# Altium PCB SMT-PBTS(Altium)v1.0.pcbdoc
Units mil, origin at the board's own origin, x right, y up, seen from the top; angles counter-clockwise.
Board outline 4553.31 x 3374.51 mil, 2 copper layers (Top Layer, Bottom Layer); 93 components, 72 nets, 271 pads, 191 vias.
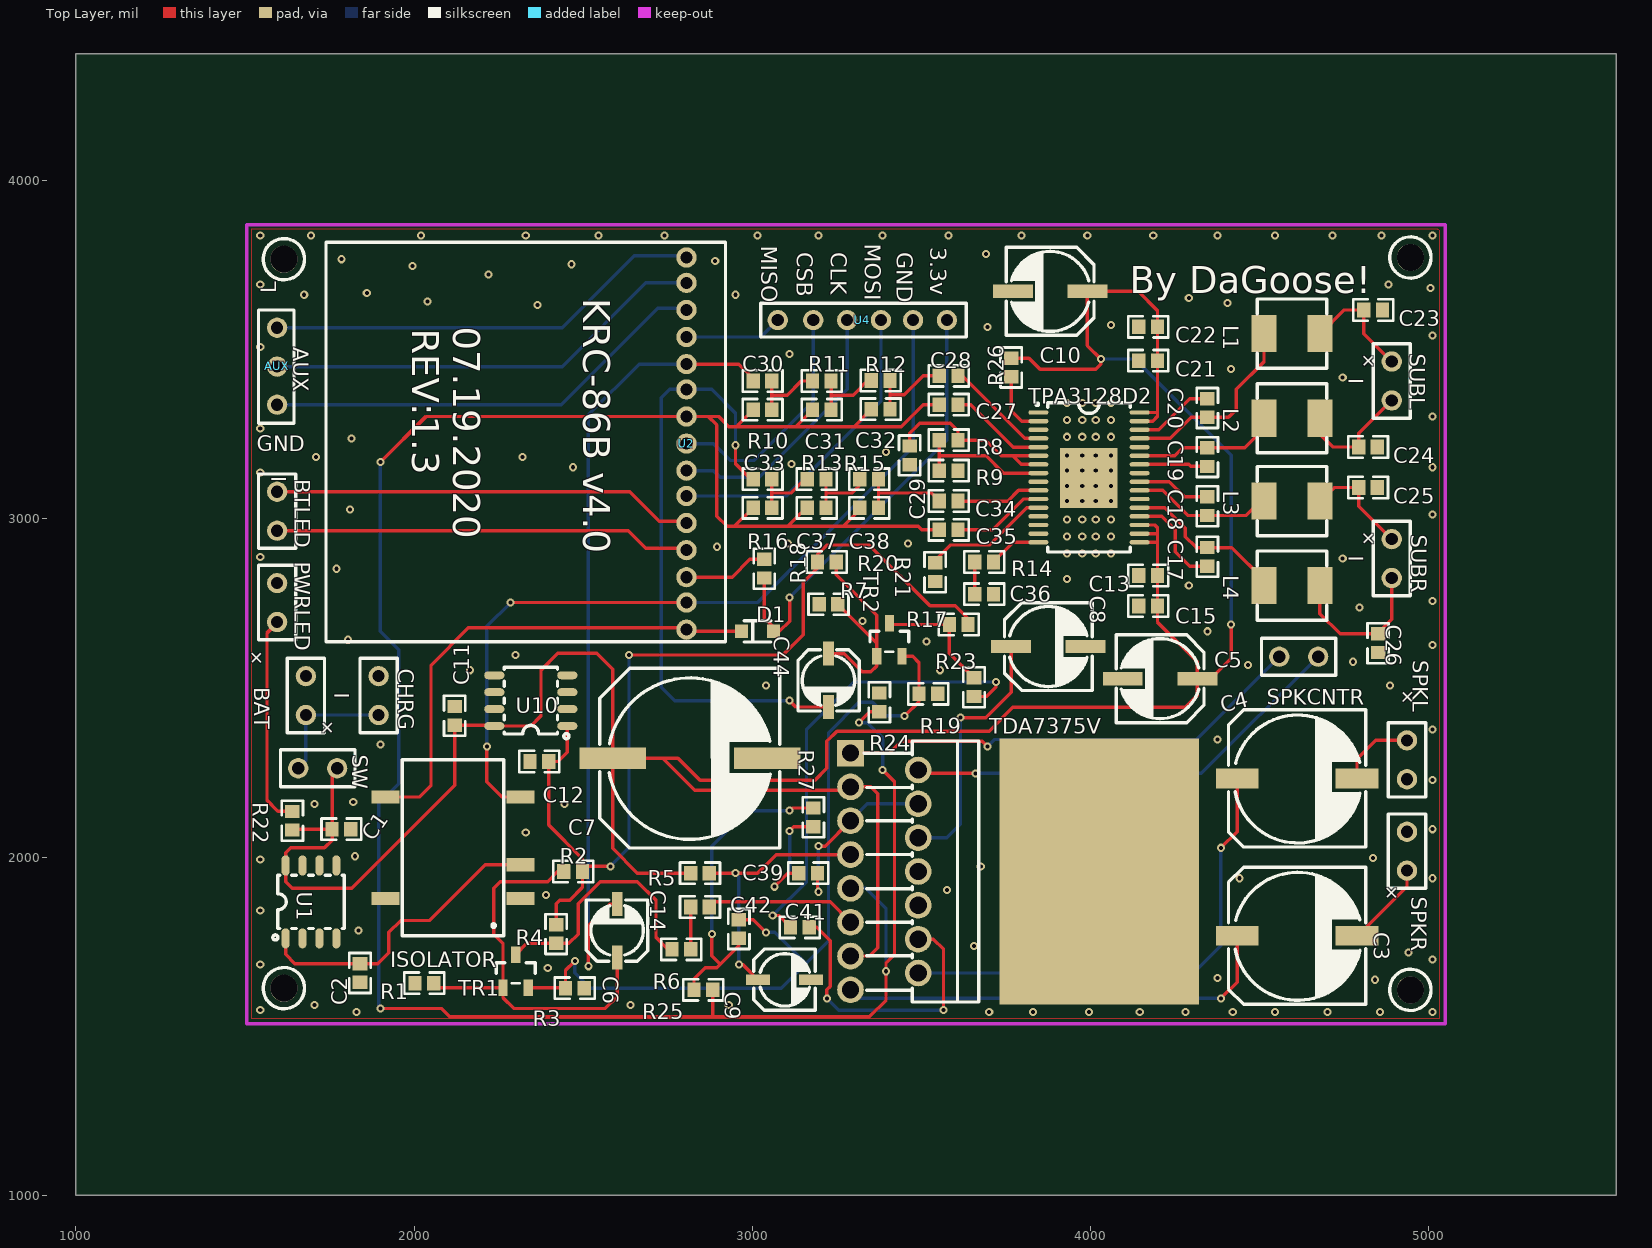
[diagram p0: Top Layer view]
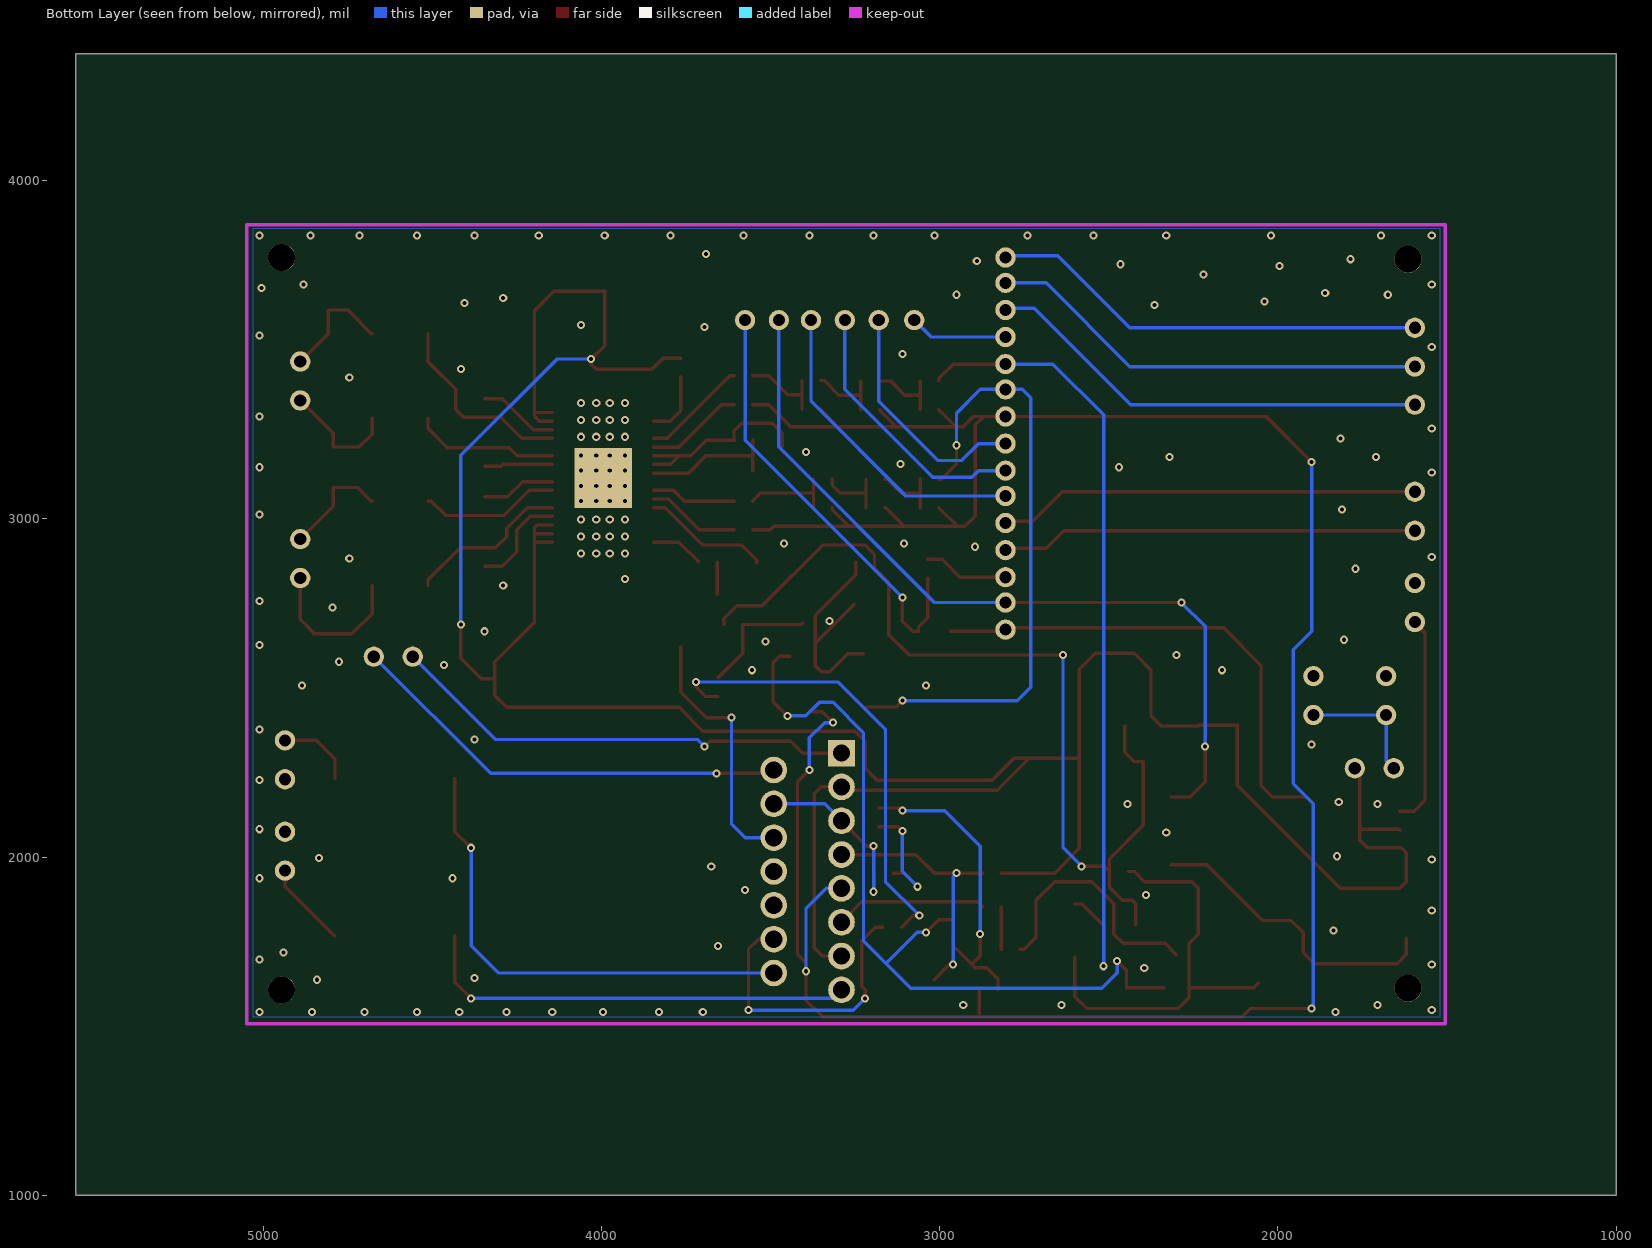
[diagram p1: Bottom Layer view, seen from below]

## Layer stack, top to bottom
Top Layer: signal copper (thickness not stored)
Dielectric: dielectric 12.6, FR-4, Dk 4.8
Bottom Layer: signal copper (thickness not stored)

## Board outline
5553.31,1000 1000,1000 1000,4374.51 5553.31,4374.51

## Components (designator, comment, footprint, x,y, rotation, side; value= is the part's Value field where it differs from the comment)
AUX "CONNECTOR (3)" "CONNECTOR (3)" 1595,3507.5 r270 top
BAT "CONNECTOR (2)" "CONNECTOR (2)" 1680,2477.5 r90 top
BTLED "CONNECTOR (2)" "CONNECTOR (2)" 1595,3022.5 r270 top
C1 "0603" 0603 1785,2082.5 r180 top
C2 "0603" 0603 1840,1657.5 r270 top
C3 "CAP-SMD_BD10.0-L10.3-W10.3-FD" CAP-SMD_BD10.0-L10.3-W10.3-FD 4610,1767.5 r0 top
C4 "CAP-SMD_BD10.0-L10.3-W10.3-FD" CAP-SMD_BD10.0-L10.3-W10.3-FD 4610,2232.5 r0 top
C5 "CAP-SMD_BD6.3-L6.6-W6.6-FD" CAP-SMD_BD6.3-L6.6-W6.6-FD 4205,2527.5 r180 top
C6 "CAP-SMD_BD4.0-L4.3-W4.3-FD" CAP-SMD_BD4.0-L4.3-W4.3-FD 2600,1782.5 r90 top
C7 "CAP-SMD_BD12.5-L13.0-W13.0-FD" CAP-SMD_BD12.5-L13.0-W13.0-FD 2815,2292.5 r0 top
C8 "CAP-SMD_BD6.3-L6.6-W6.6-FD" CAP-SMD_BD6.3-L6.6-W6.6-FD 3875,2622.5 r0 top
C9 "CAP-SMD_BD4.0-L4.3-W4.3-FD" CAP-SMD_BD4.0-L4.3-W4.3-FD 3095,1637.5 r0 top
C10 "CAP-SMD_BD6.3-L6.6-W6.6-FD" CAP-SMD_BD6.3-L6.6-W6.6-FD 3880,3672.5 r180 top
C11 "0603" 0603 2120,2417.5 r90 top
C12 "0603" 0603 2370,2282.5 r0 top
C13 "0603" 0603 4170,2832.5 r0 top
C14 "0603" 0603 2845,1852.5 r0 top
C15 "0603" 0603 4170,2742.5 r180 top
C17 "0603" 0603 4345,2887.5 r90 top
C18 "0603" 0603 4345,3037.5 r90 top
C19 "0603" 0603 4345,3182.5 r90 top
C20 "0603" 0603 4345,3327.5 r90 top
C21 "0603" 0603 4170,3467.5 r180 top
C22 "0603" 0603 4170,3567.5 r0 top
C23 "0603" 0603 4835,3617.5 r0 top
C24 "0603" 0603 4820,3212.5 r180 top
C25 "0603" 0603 4820,3092.5 r0 top
C26 "0603" 0603 4850,2632.5 r90 top
C27 "0603" 0603 3580,3337.5 r0 top
C28 "0603" 0603 3580,3422.5 r0 top
C29 "0603" 0603 3465,3187.5 r90 top
C30 "0603" 0603 3030,3407.5 r0 top
C31 "0603" 0603 3205,3322.5 r0 top
C32 "0603" 0603 3379.26,3324 r0 top
C33 "0603" 0603 3030,3117.5 r0 top
C34 "0603" 0603 3580,3052.5 r0 top
C35 "0603" 0603 3580,2967.5 r0 top
C36 "0603" 0603 3685,2777.5 r0 top
C37 "0603" 0603 3190,3032.5 r0 top
C38 "0603" 0603 3345,3032.5 r0 top
C39 "0603" 0603 3165,1952.5 r180 top
C41 "0603" 0603 3140,1792.5 r0 top
C42 "0603" 0603 2960,1787.5 r90 top
C44 "CAP-SMD_BD4.0-L4.3-W4.3-FD" CAP-SMD_BD4.0-L4.3-W4.3-FD 3225,2522.5 r270 top
CHRG "CONNECTOR (2)" "CONNECTOR (2)" 1895,2477.5 r270 top
D1 "SOD-323_L1.8-W1.3-LS2.5-RD" SOD-323_L1.8-W1.3-LS2.5-RD 3015,2667.5 r0 top
ISOLATOR "PWRM-TH_B0505XT-1WR3" PWRM-TH_B0505XT-1WR3 2115,2027.5 r90 top
L1 "IND-SMD_L5.2-W5.2_MS0530-XX" IND-SMD_L5.2-W5.2_MS0530-XX 4595,3547.5 r0 top
L2 "IND-SMD_L5.2-W5.2_MS0530-XX" IND-SMD_L5.2-W5.2_MS0530-XX 4595,3297.5 r0 top
L3 "IND-SMD_L5.2-W5.2_MS0530-XX" IND-SMD_L5.2-W5.2_MS0530-XX 4595,3052.5 r0 top
L4 "IND-SMD_L5.2-W5.2_MS0530-XX" IND-SMD_L5.2-W5.2_MS0530-XX 4595,2802.5 r0 top
PWRLED "CONNECTOR (2)" "CONNECTOR (2)" 1595,2752.5 r270 top
R1 "0603" 0603 2030,1627.5 r0 top
R2 "0603" 0603 2470,1957.5 r0 top
R3 "0603" 0603 2475,1612.5 r0 top
R4 "0603" 0603 2420,1772.5 r90 top
R5 "0603" 0603 2845,1952.5 r0 top
R6 "0603" 0603 2790,1727.5 r0 top
R7 "0603" 0603 3225,2747.5 r0 top
R8 "0603" 0603 3580,3232.5 r0 top
R9 "0603" 0603 3580,3142.5 r0 top
R10 "0603" 0603 3030,3322.5 r0 top
R11 "0603" 0603 3205,3407.5 r0 top
R12 "0603" 0603 3379.26,3409 r0 top
R13 "0603" 0603 3190,3117.5 r0 top
R14 "0603" 0603 3685,2872.5 r0 top
R15 "0603" 0603 3345,3117.5 r0 top
R16 "0603" 0603 3030,3032.5 r0 top
R17 "0603" 0603 3610,2687.5 r0 top
R18 "0603" 0603 3035,2852.5 r90 top
R19 "0603" 0603 3520,2482.5 r0 top
R20 "0603" 0603 3220,2872.5 r180 top
R21 "0603" 0603 3540,2842.5 r90 top
R22 "0603" 0603 1640,2107.5 r90 top
R23 "0603" 0603 3655,2502.5 r90 top
R24 "0603" 0603 3375,2457.5 r90 top
R25 "0603" 0603 2855,1607.5 r180 top
R26 "0603" 0603 3765,3447.5 r90 top
R27 "0603" 0603 3180,2117.5 r90 top
SPKCNTR "CONNECTOR (2)" "CONNECTOR (2)" 4615,2592.5 r0 top
SPKL "CONNECTOR (2)" "CONNECTOR (2)" 4935,2287.5 r90 top
SPKR "CONNECTOR (2)" "CONNECTOR (2)" 4935,2017.5 r90 top
SUBL "CONNECTOR (2)" "CONNECTOR (2)" 4890,3407.5 r270 top
SUBR "CONNECTOR (2)" "CONNECTOR (2)" 4890,2882.5 r270 top
SW "CONNECTOR (2)" "CONNECTOR (2)" 1715,2262.5 r0 top
TDA7375V "MULTIWATT-15_L19.6-W5.0-P1.27-L" MULTIWATT-15_L19.6-W5.0-P1.27-L 3390,1957.5 r270 top
TPA3128D2 "HTSSOP-32_L11.0-W6.1-P0.65-LS8.1-BL-EP" HTSSOP-32_L11.0-W6.1-P0.65-LS8.1-BL-EP 3995,3122.5 r270 top
TR1 "SOT-23-3_L2.9-W1.3-P1.90-LS2.4-TR" SOT-23-3_L2.9-W1.3-P1.90-LS2.4-TR 2300,1662.5 r270 top
TR2 "SOT-23-3_L2.9-W1.3-P1.90-LS2.4-TR" SOT-23-3_L2.9-W1.3-P1.90-LS2.4-TR 3405,2642.5 r270 top
U1 "SOIC-8_L4.9-W3.9-P1.27-LS6.0-BL" SOIC-8_L4.9-W3.9-P1.27-LS6.0-BL 1695,1867.5 r0 top
U2 "KRC-86B V4.0" "KRC-86B V4.0" 2845,3342.5 r270 top
U4 "KRC-86B SPI" "KRC-86B SPI" 3230,3537.5 r180 top
U10 "SOIC-8_L4.9-W3.9-P1.27-LS6.0-BL" SOIC-8_L4.9-W3.9-P1.27-LS6.0-BL 2345,2462.5 r90 top

## Footprints (in the part's own frame and the unit in brackets; to place one, negate y for a bottom-side part, rotate by r counter-clockwise, add the part's x,y. Pads: shape width x height; smd on the part's side, far side on the other; paste and mask are expansions set on the pad)
0603 [mm]
  rect 1x1.1 smd: 1(-0.7,0) 2(0.7,0)
  silkscreen extent -1.5,-0.8 1.5,0.8
CAP-SMD_BD4.0-L4.3-W4.3-FD [mil]
  rect 70.86x31.5 smd: 1(-78.74,0) 2(78.74,0)
  silkscreen extent -91,-90 91,91
CAP-SMD_BD6.3-L6.6-W6.6-FD [mm]
  rect 3x1 smd: 1(-2.8,0) 2(2.8,0)
  silkscreen extent -3.3,-3.3 3.3,3.3
CAP-SMD_BD10.0-L10.3-W10.3-FD [mm]
  rect 3.2x1.5 smd: 1(-4.5,0) 2(4.5,0)
  silkscreen extent -5.15,-5.15 5.15,5.15
CAP-SMD_BD12.5-L13.0-W13.0-FD [mm]
  rect 5x1.6 smd: 1(-5.8,0) 2(5.8,0)
  silkscreen extent -6.75,-6.75 6.75,6.75
"CONNECTOR (2)" [mil]
  round 60 hole 36: 1(-57.5,0) 2(57.5,0)
  silkscreen extent -110,-55 110,55
"CONNECTOR (3)" [mil]
  round 60 hole 36: 1(-57.5,0) 2(57.5,0) 3(170,0)
  silkscreen extent -110,-55 225,50
HTSSOP-32_L11.0-W6.1-P0.65-LS8.1-BL-EP [mm]
  oval 0.33x1.497 smd: 1(-4.874,-3.8) 2(-4.224,-3.8) 3(-3.574,-3.8) 4(-2.926,-3.8) 5(-2.276,-3.8) 6(-1.626,-3.8) 7(-0.975,-3.8) 8(-0.325,-3.8) 9(0.325,-3.8) 10(0.975,-3.8) 11(1.626,-3.8) 12(2.276,-3.8) 13(2.926,-3.8) 14(3.574,-3.8) 15(4.224,-3.8) 16(4.874,-3.8) 17(4.874,3.8) 18(4.224,3.8) 19(3.574,3.8) 20(2.926,3.8) 21(2.276,3.8) 22(1.626,3.8) 23(0.975,3.8) 24(0.325,3.8) 25(-0.325,3.8) 26(-0.975,3.8) 27(-1.626,3.8) 28(-2.276,3.8) 29(-2.926,3.8) 30(-3.574,3.8) 31(-4.224,3.8) 32(-4.874,3.8)
  rect 4.5x4.3 smd: 33(0.051,-0.025)
  silkscreen extent -5.61,-3.98 5.6,3.1
IND-SMD_L5.2-W5.2_MS0530-XX [mm]
  rect 1.9x2.79 smd: 1(-2.1,0) 2(2.1,0)
  silkscreen extent -2.6,-2.6 2.6,2.6
"KRC-86B SPI" [mil]
  round 60 hole 36: 1(-345,-50) 2(-245,-50) 4(-150,-50) 5(-50,-50) 6(50,-50) 7(155,-50)
  silkscreen extent -402,-100 205,0
"KRC-86B V4.0" [mil]
  round 60 hole 36: 1(-430,-40) 2(-355,-40) 3(-275,-40) 4(-195,-40) 5(-115,-40) 6(-40,-40) 7(40,-40) 8(120,-40) 9(200,-40) 10(275,-40) 11(355,-40) 12(435,-40) 13(515,-40) 14(590,-40) 15(670,-40)
  silkscreen extent -476,-1106 706,76
MULTIWATT-15_L19.6-W5.0-P1.27-L [mm]
  rect 2x2 hole 1.3: 1(-8.89,-2.54)
  round 2 hole 1.3: 2(-7.62,2.54) 3(-6.35,-2.54) 4(-5.08,2.54) 5(-3.81,-2.54) 6(-2.54,2.54) 7(-1.27,-2.54) 8(0,2.54) 9(1.27,-2.54) 10(2.54,2.54) 11(3.81,-2.54) 12(5.08,2.54) 13(6.35,-2.54) 14(7.62,2.54) 15(8.89,-2.54)
  silkscreen extent -9.8,-1.52 9.8,7.09
PWRM-TH_B0505XT-1WR3 [mm]
  rect 1x2.1 smd: 1(-3.81,-5.08) 2(-1.27,-5.08) 4(3.81,-5.08) 5(3.81,5.08) 8(-3.81,5.08)
  silkscreen extent -6.6,-3.81 6.6,3.81
SOD-323_L1.8-W1.3-LS2.5-RD [mm]
  rect 1x1 smd: 1(-1.2,0) 2(1.2,0)
  silkscreen extent -1,-0.8 1,0.8
SOIC-8_L4.9-W3.9-P1.27-LS6.0-BL [mm]
  oval 0.6x1.518 smd: 1(-1.905,-2.74) 2(-0.635,-2.74) 3(0.635,-2.74) 4(1.905,-2.74) 5(1.905,2.74) 6(0.635,2.74) 7(-0.635,2.74) 8(-1.905,2.74)
  silkscreen extent -2.86,-2.86 2.5,2
SOT-23-3_L2.9-W1.3-P1.90-LS2.4-TR [mm]
  rect 1.25x0.7 smd: 1(1.25,0.95) 2(1.25,-0.95) 3(-1.25,0)
  silkscreen extent -0.65,-1.46 0.9,1.46

## Free pads (board coordinates)
  rect 590.55x787.4 smd: 1(4025,1957.5)
  rect 169.29x177.17 smd far side: 33(3994.01,3120.5)
  round 80 hole 80 unplated: ""(1615,1612.5) ""(1615,3767.5) ""(4945,1607.5) ""(4945,3772.5)

## Via types
v1: diameter 24, hole 12, Top Layer to Bottom Layer, 191 vias

## Nets (pads, with @x,y where several pads share a name; then routed paths per layer and width w, separated by ;. In a path a pad name is that pad's centre, name@x,y a point inside that pad or via, vN(x,y) a via of type N, cw(c..) or ccw(c..) an arc to the next point about the centre after c; other vN are vias at no path point)
GND: BAT.2 C1.1 C2.2 C5.2 C7.2 C8.2 C9.2 C10.2 C11.2 C12.1 C13.1 C15.2 C21.2 C22.1 C23.2 C24.1 C25.2 C26.1 C29.1 C36.2 CHRG.1 ISOLATOR.1 pad.1 pad.33 PWRLED.1 R1.1 R3.2 R7.1 R9.2 R19.2 R21.1 R24.2 SPKL.1 SPKR.2 TDA7375V.8 TPA3128D2.1 TPA3128D2.9 TPA3128D2.13 TPA3128D2.14 TPA3128D2.15 TPA3128D2.22 TPA3128D2.25 TPA3128D2.28 TPA3128D2.33 U1.2 U1.3 U1.6 U1.7 U10.2 U10.3 U10.6 U10.7
  other v1: 1830,1542.5 3700,1542.5 3830,1542.5 3995,1542.5 4145,1542.5 4280,1542.5 4420,1542.5 4545,1542.5 4700,1542.5 4855,1542.5 5010,1542.5 1545,1547.5 1705,1562.5 2640,1562.5 2930,1562.5 4840,1637.5 4375,1642.5 2395,1672.5 1545,1682.5 5010,1697.5 4940,1717.5 3655,1737.5 1835,1782.5 1545,1842.5 2390,1887.5 3575,1902.5 4440,1937.5 5010,1937.5 3675,1972.5 1545,1992.5 4835,1997.5 1825,2002.5 2330,2072.5 5010,2082.5 1705,2157.5 2445,2157.5 1820,2162.5 5010,2227.5 1900,2332.5 4375,2347.5 5010,2377.5 3040,2507.5 4885,2507.5 2165,2552.5 3555,2552.5 4465,2567.5 4775,2577.5 2300,2597.5 5010,2627.5 3515,2637.5 1805,2642.5 4345,2667.5 3325,2697.5 4795,2737.5 5010,2757.5 4290,2802.5 3930,2822.5 1770,2852.5 4745,2882.5 1545,2887.5 3930,2897.5 3975,2897.5 4015,2897.5 4060,2897.5 2895,2917.5 3105,2927.5 3460,2927.5 3930,2947.5 3975,2947.5 4015,2947.5 4060,2947.5 3930,2997.5 3975,2997.5 4015,2997.5 4060,2997.5 5010,3012.5 1810,3027.5 3930,3052.5 3975,3052.5 4015,3052.5 4060,3052.5 3930,3097.5 3975,3097.5 4015,3097.5 4060,3097.5 1545,3137.5 3930,3142.5 3975,3142.5 4015,3142.5 4060,3142.5 2470,3152.5 5010,3152.5 3115,3162.5 1710,3182.5 2320,3182.5 3930,3187.5 3975,3187.5 4015,3187.5 4060,3187.5 3395,3197.5 1815,3237.5 3930,3242.5 3975,3242.5 4015,3242.5 4060,3242.5 1545,3267.5 3930,3292.5 3975,3292.5 4015,3292.5 4060,3292.5 5010,3302.5 3930,3342.5 3975,3342.5 4015,3342.5 4060,3342.5 4745,3417.5 4415,3442.5 3110,3487.5 1545,3507.5 5010,3542.5 3695,3567.5 4060,3572.5 2365,3632.5 4405,3637.5 2040,3642.5 4290,3652.5 1675,3662.5 2950,3662.5 1860,3667.5 5005,3682.5 1545,3692.5 4880,3692.5 2220,3722.5 1995,3747.5 2465,3752.5 2890,3762.5 1785,3767.5 3690,3782.5 1545,3837.5 1695,3837.5 2020,3837.5 2330,3837.5 2545,3837.5 2740,3837.5 3015,3837.5 3195,3837.5 3385,3837.5 3580,3837.5 3795,3837.5 3990,3837.5 4185,3837.5 4375,3837.5 4545,3837.5 4715,3837.5 4860,3837.5 5010,3837.5
S$67: 
S$69: 
S$1835: C2.1 ISOLATOR.2 U1.1 | length 909.8
  Top Layer w10: U1.1 1620,1712.5 1647.44,1685.06 C2.1 1892.56,1685.06 1925,1717.5 1925,1777.5 1960,1812.5 2045,1812.5 2210,1977.5 ISOLATOR.2
S$1846: D1.1 ISOLATOR.5 U2.15 | length 1472
  Top Layer w10: ISOLATOR.5 2015,2177.5 2050,2212.5 2050,2567.5 2160,2677.5 2800,2677.5 U2.15 2810,2667.5 D1.1
S$1848: ISOLATOR.4 U2.14 U4.2 | length 2433.2
  Top Layer w10: v1(2215,2327.5) 2215,2222.5 2260,2177.5 ISOLATOR.4 ; v1(2285,2752.5) U2.14
  Bottom Layer w10: v1(2215,2327.5) 2215,2682.5 v1(2285,2752.5) ; U2.14 3015,2752.5 3475,3212.5 U4.2
S$1854: U2.4 U4.7 | length 290.7
  Bottom Layer w10: U2.4 3025,3537.5 U4.7
S$1858: R18.2 U2.13 | length 251.8
  Top Layer w10: U2.13 2940,2827.5 2992.55,2880.05 R18.2@3035,2880.05
S$1860: U2.10 U4.4 | length 931
  Bottom Layer w10: U2.10 3100,3067.5 3380,3347.5 U4.4
S$1862: U2.9 U4.5 | length 796
  Bottom Layer w10: U2.9 2885,3142.5 2905,3122.5 3020,3122.5 3280,3382.5 U4.5
S$1864: U2.8 U4.6 | length 708.2
  Bottom Layer w10: U2.8 2885,3222.5 2935,3172.5 3005,3172.5 3180,3347.5 U4.6
S$2534: BAT.1 CHRG.2 SW.1 | length 381.8
  Bottom Layer w10: SW.1 1680,2285 BAT.1 CHRG.2
S$3305: C4.2 SPKL.2 | length 227.9
  Top Layer w10: C4.2 4787.2,2289.7 4842.5,2345 SPKL.2
S$3307: C3.2 SPKR.1 | length 255.4
  Top Layer w10: C3.2 4790,1767.5 4935,1912.5 SPKR.1
S$3855: C12.2 R2.2 R4.2 R17.2 R20.2 U10.1 | length 2813
  Top Layer w10: C12.2 2425,2282.5 2452.87,2310.37 U10.1 ; C12.2 2397.6,2094.9 2497.56,1994.94 R2.2 2512.56,1972.5 v1(2580,1972.5) ; R4.2@2420,1800 2420,1862.5 2430,1872.5 2460,1872.5 2497.6,1910.1 R2.2 ; v1(2635,2597.5) 3090,2597.5 3150,2657.5 3150,2812.5 3192.5,2855 3192.5,2872.5 3192.5,2895 3220,2922.5 3345,2922.5 3525,2742.5 3600,2742.5 3637.6,2704.9 R17.2
  Bottom Layer w10: v1(2580,1972.5) 2635,2027.5 v1(2635,2597.5)
S$3863: C6.1 R1.2 R2.1 TR1.2 | length 1254.7
  Top Layer w10: R1.2 2071.76,1613.3 TR1.2 ; R2.1 2425,1957.5 2395,1927.5 2255,1927.5 2235,1907.5 2235,1772.5 2262.6,1744.9 TR1.2 ; C6.1 2600,1587.5 2565,1552.5 2295,1552.5 2262.6,1584.9 TR1.2
S$3876: C3.1 TDA7375V.15 | length 1310.2
  Top Layer w10: v1(4385,1582.5) 4432.8,1630.3 C3.1
  Bottom Layer w10: TDA7375V.15 3315,1582.5 v1(4385,1582.5)
S$3878: C4.1 TDA7375V.14 | length 1442.9
  Top Layer w10: v1(4385,2027.5) 4432.8,2075.3 C4.1
  Bottom Layer w10: TDA7375V.14 4305,1657.5 4385,1737.5 v1(4385,2027.5)
S$3900: C42.2 R3.1 R19.1 TR1.1 TR2.1 | length 2441.7
  Top Layer w10: TR1.1 2446.64,1613.3 R3.1 2447.44,1664.94 v1(2475,1692.5) ; C42.2@2960,1815.05 3002.45,1815.05 v1(3040,1777.5) ; TR2.1 3474.2,2593.3 3492.44,2575.06 R19.1 ; v1(3450,2417.5) 3492.4,2459.9 R19.1
  Bottom Layer w10: v1(2475,1692.5) 2475,1657.5 2520,1612.5 3085,1612.5 3225,1752.5 3225,2367.5 3315,2457.5 3355,2457.5 3395,2417.5 v1(3450,2417.5) ; v1(3040,1777.5) 3066.2,1777.5 3158.1,1685.6
S$3902: R4.1 R6.1 TR1.3 | length 751.8
  Top Layer w10: TR1.3 2333.2,1744.9 R4.1 2457.4,1744.9 2485,1772.5 2485,1862.5 2550,1927.5 2660,1927.5 2715,1872.5 2715,1762.5 2750,1727.5 R6.1
S$3945: C6.2 C30.1 U2.5 | length 2436.1
  Top Layer w10: v1(2515,1677.5) 2515,1797.5 2578.74,1861.24 C6.2 ; U2.5 2960,3457.5 3002.44,3415.06 C30.1
  Bottom Layer w10: v1(2515,1677.5) 2515,3307.5 2665,3457.5 U2.5
S$3987: C9.1 R5.2 TDA7375V.7 | length 789.2
  Top Layer w10: R5.2 v1(2950,1952.5) 3015,1952.5 3070,2007.5 TDA7375V.7 ; v1(2960,1682.5) 2971.26,1682.5 C9.1
  Bottom Layer w10: v1(2950,1952.5) 2960,1942.5 v1(2960,1682.5)
S$4166: C8.1 TDA7375V.6 | length 772.5
  Top Layer w10: v1(3615,2412.5) 3690,2412.5 3764.76,2487.26 C8.1
  Bottom Layer w10: TDA7375V.6 3575,2057.5 3615,2097.5 v1(3615,2412.5)
S$4169: C14.1 R6.2 | length 125
  Top Layer w10: C14.1 2817.56,1852.38 R6.2
S$4220: C1.2 C5.1 C7.1 C10.1 C11.1 C13.2 C15.1 C21.1 C22.2 R5.1 R22.1 R26.2 SW.2 TDA7375V.3 TDA7375V.13 TPA3128D2.17 TPA3128D2.18 TPA3128D2.19 TPA3128D2.31 TPA3128D2.32 U1.8 U10.8 | length 9083.5
  Top Layer w10: R22.1 1642.56,2082.5 C1.2@1757.5,2082.5 ; SW.2 1757.45,2247.45 1757.45,2082.5 1757.45,2049.95 1735,2027.5 1635,2027.5 1620,2012.5 U1.8 1620,1927.5 1640,1907.5 1815,1907.5 2120,2212.5 C11.1 ; C11.1 2234.69,2389.94 U10.8 2345,2387.5 2375,2417.5 2375,2552.5 2425,2602.5 2540,2602.5 2586.65,2555.85 2586.65,2292.5 2586.65,2025.85 2660,1952.5 R5.1 ; C7.1 2735,2292.5 ; TDA7375V.13 3345,1707.5 3370,1732.5 3370,2187.5 3350,2207.5 TDA7375V.3 3290,2197.5 2830,2197.5 2735,2292.5 ; R26.2 3817.6,3475.1 3850.1,3442.5 4015,3442.5 4030,3457.5 v1(4030,3472.5) 3990.24,3512.26 C10.1 ; C10.1 4140.1,3672.5 4197.56,3615.04 C22.2 C21.1 4197.56,3314.4 ; TPA3128D2.17 4197.56,2930.6 ; TPA3128D2.18 4197.56,2956.2 ; TPA3128D2.19 4189.3,2981.8 4197.56,2973.54 C13.2 C15.1 4197.56,2694.94 4315.24,2577.26 C5.1 ; TPA3128D2.31 4183.7,3288.8 4197.56,3302.66 4197.56,3314.4 ; TPA3128D2.32 4197.56,3314.4 ; v1(4415,2687.5) 4415,2587.5 4355,2527.5 C5.1 ; 2735,2292.5 2780,2292.5 2845,2227.5 3185,2227.5 3220,2262.5 3220,2342.5 3250,2372.5 3700,2372.5 3770,2442.5 4280,2442.5 4315.24,2477.74 C5.1
  Bottom Layer w10: v1(4030,3472.5) 4130,3472.5 4415,3187.5 v1(4415,2687.5)
S$4225: C39.1 TDA7375V.4 TDA7375V.5 | length 537.8
  Top Layer w10: C39.1 3192.56,1899.94 v1(3195,1897.5) ; v1(3195,2032.5) 3215,2032.5 TDA7375V.5
  Bottom Layer w10: v1(3195,1897.5) v1(3195,2032.5) ; TDA7375V.5 3340,2157.5 TDA7375V.4
S$4227: C39.2 R27.1 | length 347.8
  Top Layer w10: v1(3065,1912.5) 3105,1952.5 C39.2 ; v1(3110,2077.5) 3122.44,2089.94 R27.1
  Bottom Layer w10: v1(3065,1912.5) 3110,1957.5 v1(3110,2077.5)
S$4229: C41.1 R23.1 | length 1367.8
  Top Layer w10: v1(3060,1827.5) 3077.44,1827.5 C41.1 ; R23.1 3692.4,2474.9 3720,2502.5 v1(3720,2517.5)
  Bottom Layer w10: v1(3060,1827.5) 3160,1927.5 3160,2377.5 3300,2517.5 v1(3720,2517.5)
S$4337: C26.2 L4.2 SUBR.2 | length 461.2
  Top Layer w10: L4.2 4677.68,2719.82 4737.44,2660.06 C26.2 ; C26.2 4850,2662.5 4890,2702.5 SUBR.2
S$4360: C25.1 L3.2 SUBR.1 | length 324.2
  Top Layer w10: L3.2 4680,3052.5 4720,3092.5 C25.1 4792.44,3037.56 SUBR.1
S$4363: C24.2 L2.2 SUBL.2 | length 355.8
  Top Layer w10: L2.2 4677.68,3249.82 4715,3212.5 C24.2 4792.44,3252.44 SUBL.2
S$4366: C23.1 L1.2 SUBL.1 | length 345.5
  Top Layer w10: L1.2 4680,3547.5 4750,3617.5 C23.1 4807.44,3547.56 SUBL.1
S$4454: R17.1 R23.2 TR2.3 | length 366.7
  Top Layer w10: TR2.3 3409.2,2687.5 R17.1 3582.4,2602.6 R23.2@3655,2530
S$4458: C44.1 R7.2 R20.1 TR2.2 | length 731.2
  Top Layer w10: C44.1 3271.26,2601.24 3325,2547.5 3350.2,2547.5 3367.6,2564.9 TR2.2 ; R20.1 3247.56,2834.94 3367.6,2714.9 TR2.2 ; R7.2 3367.6,2632.46 TR2.2
S$4468: C33.1 C44.2 U2.6 | length 1854.8
  Top Layer w10: v1(2950,3217.5) 2950,3162.5 2995,3117.5 C33.1 ; v1(3110,2462.5) 3128.74,2443.76 C44.2
  Bottom Layer w10: v1(2950,3217.5) 2950,3312.5 2880,3382.5 U2.6 2755,3382.5 2730,3357.5 2730,2502.5 2770,2462.5 v1(3110,2462.5)
S$4727: C17.2 L4.1 TPA3128D2.21 | length 488.2
  Top Layer w10: TPA3128D2.21 4219.6,3032.9 4280,2972.5 4280,2947.5 4310,2917.5 4312.45,2915.05 4345,2915.05 4417.45,2915.05 4512.32,2820.18 L4.1
S$4729: C17.1 TPA3128D2.20 | length 299.6
  Top Layer w10: TPA3128D2.20 4210.2,3007.3 4250,2967.5 4250,2902.38 4292.44,2859.94 C17.1
S$4732: C18.1 L3.1 TPA3128D2.23 | length 416.1
  Top Layer w10: TPA3128D2.23 4213.3,3084.1 4287.4,3009.9 C18.1 ; C18.1 4460,3009.94 4502.56,3052.5 L3.1
S$4734: C18.2 TPA3128D2.24 | length 218.9
  Top Layer w10: TPA3128D2.24 4232.8,3109.7 4277.45,3065.05 C18.2@4345,3065.05
S$4736: C19.2 L2.1 TPA3128D2.27 | length 431.3
  Top Layer w10: TPA3128D2.27 4248.9,3186.5 4272.5,3210 C19.2@4345,3210 ; C19.2@4345,3210.05 4455,3210.05 4512.32,3267.37 L2.1
S$4738: C20.2 TPA3128D2.30 | length 238.4
  Top Layer w10: TPA3128D2.30 4200.7,3263.2 4290,3352.5 4292.55,3355.05 C20.2@4345,3355.05
S$4741: C19.1 TPA3128D2.26 | length 202.9
  Top Layer w10: TPA3128D2.26 4290,3160.9 4295.96,3154.94 C19.1
S$4744: C20.1 L1.1 TPA3128D2.29 | length 579.6
  Top Layer w10: TPA3128D2.29 4235.2,3237.7 4297.44,3299.94 C20.1 4407.44,3299.94 4430,3322.5 4430,3382.5 4512.32,3464.82 L1.1
S$4761: SPKCNTR.1 TDA7375V.1 | length 1398
  Top Layer w10: TDA7375V.1 3405,2307.5 3440,2342.5 3680,2342.5 v1(3695,2327.5)
  Bottom Layer w10: v1(3695,2327.5) 3715,2347.5 4312.5,2347.5 SPKCNTR.1
S$4763: SPKCNTR.2 TDA7375V.2 | length 1329.5
  Top Layer w10: TDA7375V.2 3500,2247.5 v1(3660,2247.5)
  Bottom Layer w10: v1(3660,2247.5) 4327.5,2247.5 SPKCNTR.2
S$4794: C28.2 TPA3128D2.4 | length 314.4
  Top Layer w10: C28.2 3620,3422.5 3804.8,3237.7 TPA3128D2.4
S$4796: C27.2 TPA3128D2.5 | length 289.8
  Top Layer w10: C27.2 3645,3337.5 3770.4,3212.1 TPA3128D2.5
S$4798: C29.2 R8.2 TPA3128D2.6 TPA3128D2.7 | length 573
  Top Layer w10: C29.2@3465,3215 3465,3252.5 3495,3282.5 3585,3282.5 3607.6,3259.9 R8.2 ; R8.2 3690,3232.5 3736,3186.5 TPA3128D2.6 ; 3769.14,3186.5 3794.74,3160.9 TPA3128D2.7
S$4820: R8.1 R9.1 TPA3128D2.8 | length 404
  Top Layer w10: R9.1 R8.1 ; 3552.44,3186.02 3691.48,3186.02 3742.2,3135.3 TPA3128D2.8
S$4828: C30.2 R10.2 R11.1 | length 222.4
  Top Layer w10: R10.2 C30.2 ; 3057.55,3365.28 3102.78,3365.28 3145,3407.5 R11.1
S$4831: C31.2 R11.2 R12.1 | length 222.3
  Top Layer w10: C31.2 R11.2 ; 3232.55,3365.19 3297.69,3365.19 3341.5,3409 R12.1
S$4869: C28.1 C32.2 R12.2 | length 253.8
  Top Layer w10: C32.2 R12.2 ; 3406.81,3366.54 3449.04,3366.54 3505,3422.5 C28.1
S$4877: C34.2 TPA3128D2.10 | length 250.9
  Top Layer w10: C34.2 3755,3052.5 3786.6,3084.1 TPA3128D2.10
S$4879: C35.2 TPA3128D2.11 | length 275.5
  Top Layer w10: C35.2 3710,2967.5 3801,3058.5 TPA3128D2.11
S$4951: C33.2 R13.1 R16.2 | length 207
  Top Layer w10: R16.2 C33.2 ; 3057.56,3076.18 3113.68,3076.18 3155,3117.5 R13.1
S$4953: C37.2 R13.2 R15.1 | length 212.3
  Top Layer w10: C37.2 R13.2 ; 3217.56,3076.18 3293.68,3076.18 3317.44,3099.94 R15.1
S$4955: C34.1 C38.2 R15.2 | length 275.4
  Top Layer w10: C38.2 R15.2 ; 3372.56,3076.18 3530,3076.18 3552.44,3053.74 C34.1
S$4992: C14.2 TDA7375V.11 | length 448.5
  Top Layer w10: C14.2 2887.56,1867.5 3230,1867.5 TDA7375V.11
S$5031: D1.2 R18.1 U4.1 | length 1311.5
  Top Layer w10: R18.1 3035,2707.5 3062.2,2680.3 D1.2 ; D1.2 3080,2667.5 3110,2697.5 v1(3110,2767.5)
  Bottom Layer w10: v1(3110,2767.5) 3575,3232.5 U4.1
S$5157: C36.1 R14.1 | length 95
  Top Layer w10: C36.1 R14.1
S$5159: R14.2 TPA3128D2.16 | length 156.9
  Top Layer w10: R14.2 3770.66,2930.6 TPA3128D2.16
S$5162: R21.2 TPA3128D2.12 | length 377.3
  Top Layer w10: R21.2@3540,2870 3540,2877.5 3585,2922.5 3700,2922.5 3810.4,3032.9 TPA3128D2.12
S$5174: AUX.1 U2.1 | length 1300.1
  Bottom Layer w10: AUX.1 2437.5,3565 2650,3777.5 2800,3777.5 U2.1
S$5176: AUX.2 U2.2 | length 1312.5
  Bottom Layer w10: AUX.2 2437.5,3450 2685,3697.5 U2.2
S$5178: AUX.3 U2.3 | length 1330.1
  Bottom Layer w10: AUX.3 2435,3337.5 2720,3622.5 2800,3622.5 U2.3
S$5187: BTLED.2 U2.12 | length 1233.8
  Top Layer w10: BTLED.2 2632.5,2965 2685,2912.5 2800,2912.5 U2.12
S$5189: BTLED.1 U2.11 | length 1248.3
  Top Layer w10: BTLED.1 2637.5,3080 2725,2992.5 2800,2992.5 U2.11
S$5344: PWRLED.2 R22.2 | length 628.4
  Top Layer w10: PWRLED.2 1595,2692.5 1565,2662.5 1565,2167.5 1597.45,2135.05 R22.2@1640,2135.05
S$5469: C41.2 TDA7375V.12 | length 880.1
  Top Layer w10: C41.2@3167.5,1792.5 3190,1792.5 3230,1752.5 3230,1617.5 3220,1607.5 v1(3220,1582.5) ; TDA7375V.12 3535,1757.5 3565,1727.5 v1(3565,1547.5)
  Bottom Layer w10: v1(3220,1582.5) 3255,1547.5 v1(3565,1547.5)
S$5587: C27.1 C31.1 C32.1 C35.1 C37.1 C38.1 R10.1 R16.1 R24.1 R25.1 TDA7375V.9 U2.7 | length 7721.5
  Top Layer w10: v1(1900,1552.5) 2080,1552.5 2105,1527.5 3345,1527.5 3395,1577.5 v1(3395,1662.5) 3395,1687.5 3420,1712.5 3420,2222.5 v1(3385,2257.5) ; v1(1900,3167.5) 2035,3302.5 U2.7 2900,3302.5 2930,3272.5 3440,3272.5 3505,3337.5 C27.1 ; 2870,3302.5 2895,3277.5 2895,3007.5 2925,2977.5 3490,2977.5 3500,2967.5 C35.1 ; 2882.56,1527.5 R25.1 ; 2946.9,2977.5 R16.1 ; 2952.8,3272.5 R10.1 ; 3104.8,2977.5 3159.8,3032.5 C37.1 ; 3128.7,3272.5 3177.4,3321.2 C31.1 ; 3268,2977.5 3317.4,3027 C38.1 ; 3300.9,3272.5 C32.1 ; v1(3315,2397.5) 3347.44,2429.94 R24.1
  Bottom Layer w10: v1(1900,1552.5) 1895,1557.5 1895,2157.5 1955,2217.5 1955,2612.5 1900,2667.5 v1(1900,3167.5) ; TDA7375V.9 3335,1907.5 3395,1847.5 v1(3395,1662.5) ; v1(3315,2397.5) 3340,2397.5 3385,2352.5 v1(3385,2257.5)
S$5655: C42.1 R25.2 R27.2 | length 934.6
  Top Layer w10: R25.2@2827.45,1607.5 2827.45,1639.95 2860,1672.5 2895,1672.5 2960,1737.5 C42.1 ; v1(2880,1772.5) 2880,1708.16 2905.33,1682.83 ; v1(3110,2137.5) 3117.55,2145.05 R27.2@3180,2145.05
  Bottom Layer w10: v1(2880,1772.5) 2880,2032.5 2985,2137.5 v1(3110,2137.5)
S$6498: R26.1 TPA3128D2.2 | length 193.2
  Top Layer w10: R26.1 3765,3320.1 3796.3,3288.8 TPA3128D2.2
pads on no net: ISOLATOR.8 TDA7375V.10 TPA3128D2.3 U1.4 U1.5 U10.4 U10.5

## Polygon pours and split planes (outlines as drawn)
GND on Top Layer (solid): 1520,3857.5 5025,3857.5 5030,3852.5 5030,1522.5 4160,1522.5 3285,1522.5 1525,1522.5 1520,1522.5 1520,1532.5
GND on Bottom Layer (solid): 1520,3857.5 5030,3857.5 5030,1527.5 1520,1527.5

## Silkscreen, mask and mechanical layers (free items; w line width, h text height)
Top Overlay:
  circle w10: c4945,1607.5 r61.03
  circle w10: c4945,3772.5 r61.03
  circle w10: c1615,1612.5 r61.03
  circle w10: c1615,3767.5 r61.03
  text "L" at 1592.5,3667.5 h45 r90
  text "By DaGoose!" at 4115,3667.5 h80
  text "07.19.2020" at 2115,3567.5 h80 r270
  text "REV:1.3" at 1995,3562.5 h80 r270
  text "AUX" at 1642.5,3507.5 h45 r270
  text "+" at 4789.09,3471.59 h45 r315
  text "−" at 4755,3367.5 h86.61
  text "GND" at 1535,3200 h45
  text "−" at 1630,3157.5 h86.61 r180
  text "+" at 4789.09,2946.59 h45 r315
  text "−" at 4755,2842.5 h86.61
  text "+" at 1565.91,2583.41 h45 r135
  text "−" at 1815,2517.5 h86.61 r180
  text "+" at 4930.91,2441.59 h45 r45
  text "+" at 1749.09,2413.41 h45 r225
  text "+" at 4920.91,1888.41 h45 r135
Document:
  lines w0.1: 3275.65,2686.25 3277.65,2688.25

## Text inside footprints (layer, text, board x,y; h text height)
U2: Top Overlay "KRC-86B v4.0" at 2500,3652.5 h80 r270
U4: Top Overlay "MISO" at 3026.38,3807.5 h47.24 r270; Top Overlay "CSB" at 3131.38,3787.5 h47.24 r270; Top Overlay "CLK" at 3231.38,3787.5 h47.24 r270; Top Overlay "MOSI" at 3331.38,3812.5 h47.24 r270; Top Overlay "GND" at 3426.38,3787.5 h47.24 r270; Top Overlay "3.3v" at 3526.38,3802.5 h47.24 r270